# EAGLE board monome40h_grid (EAGLE 4.15)
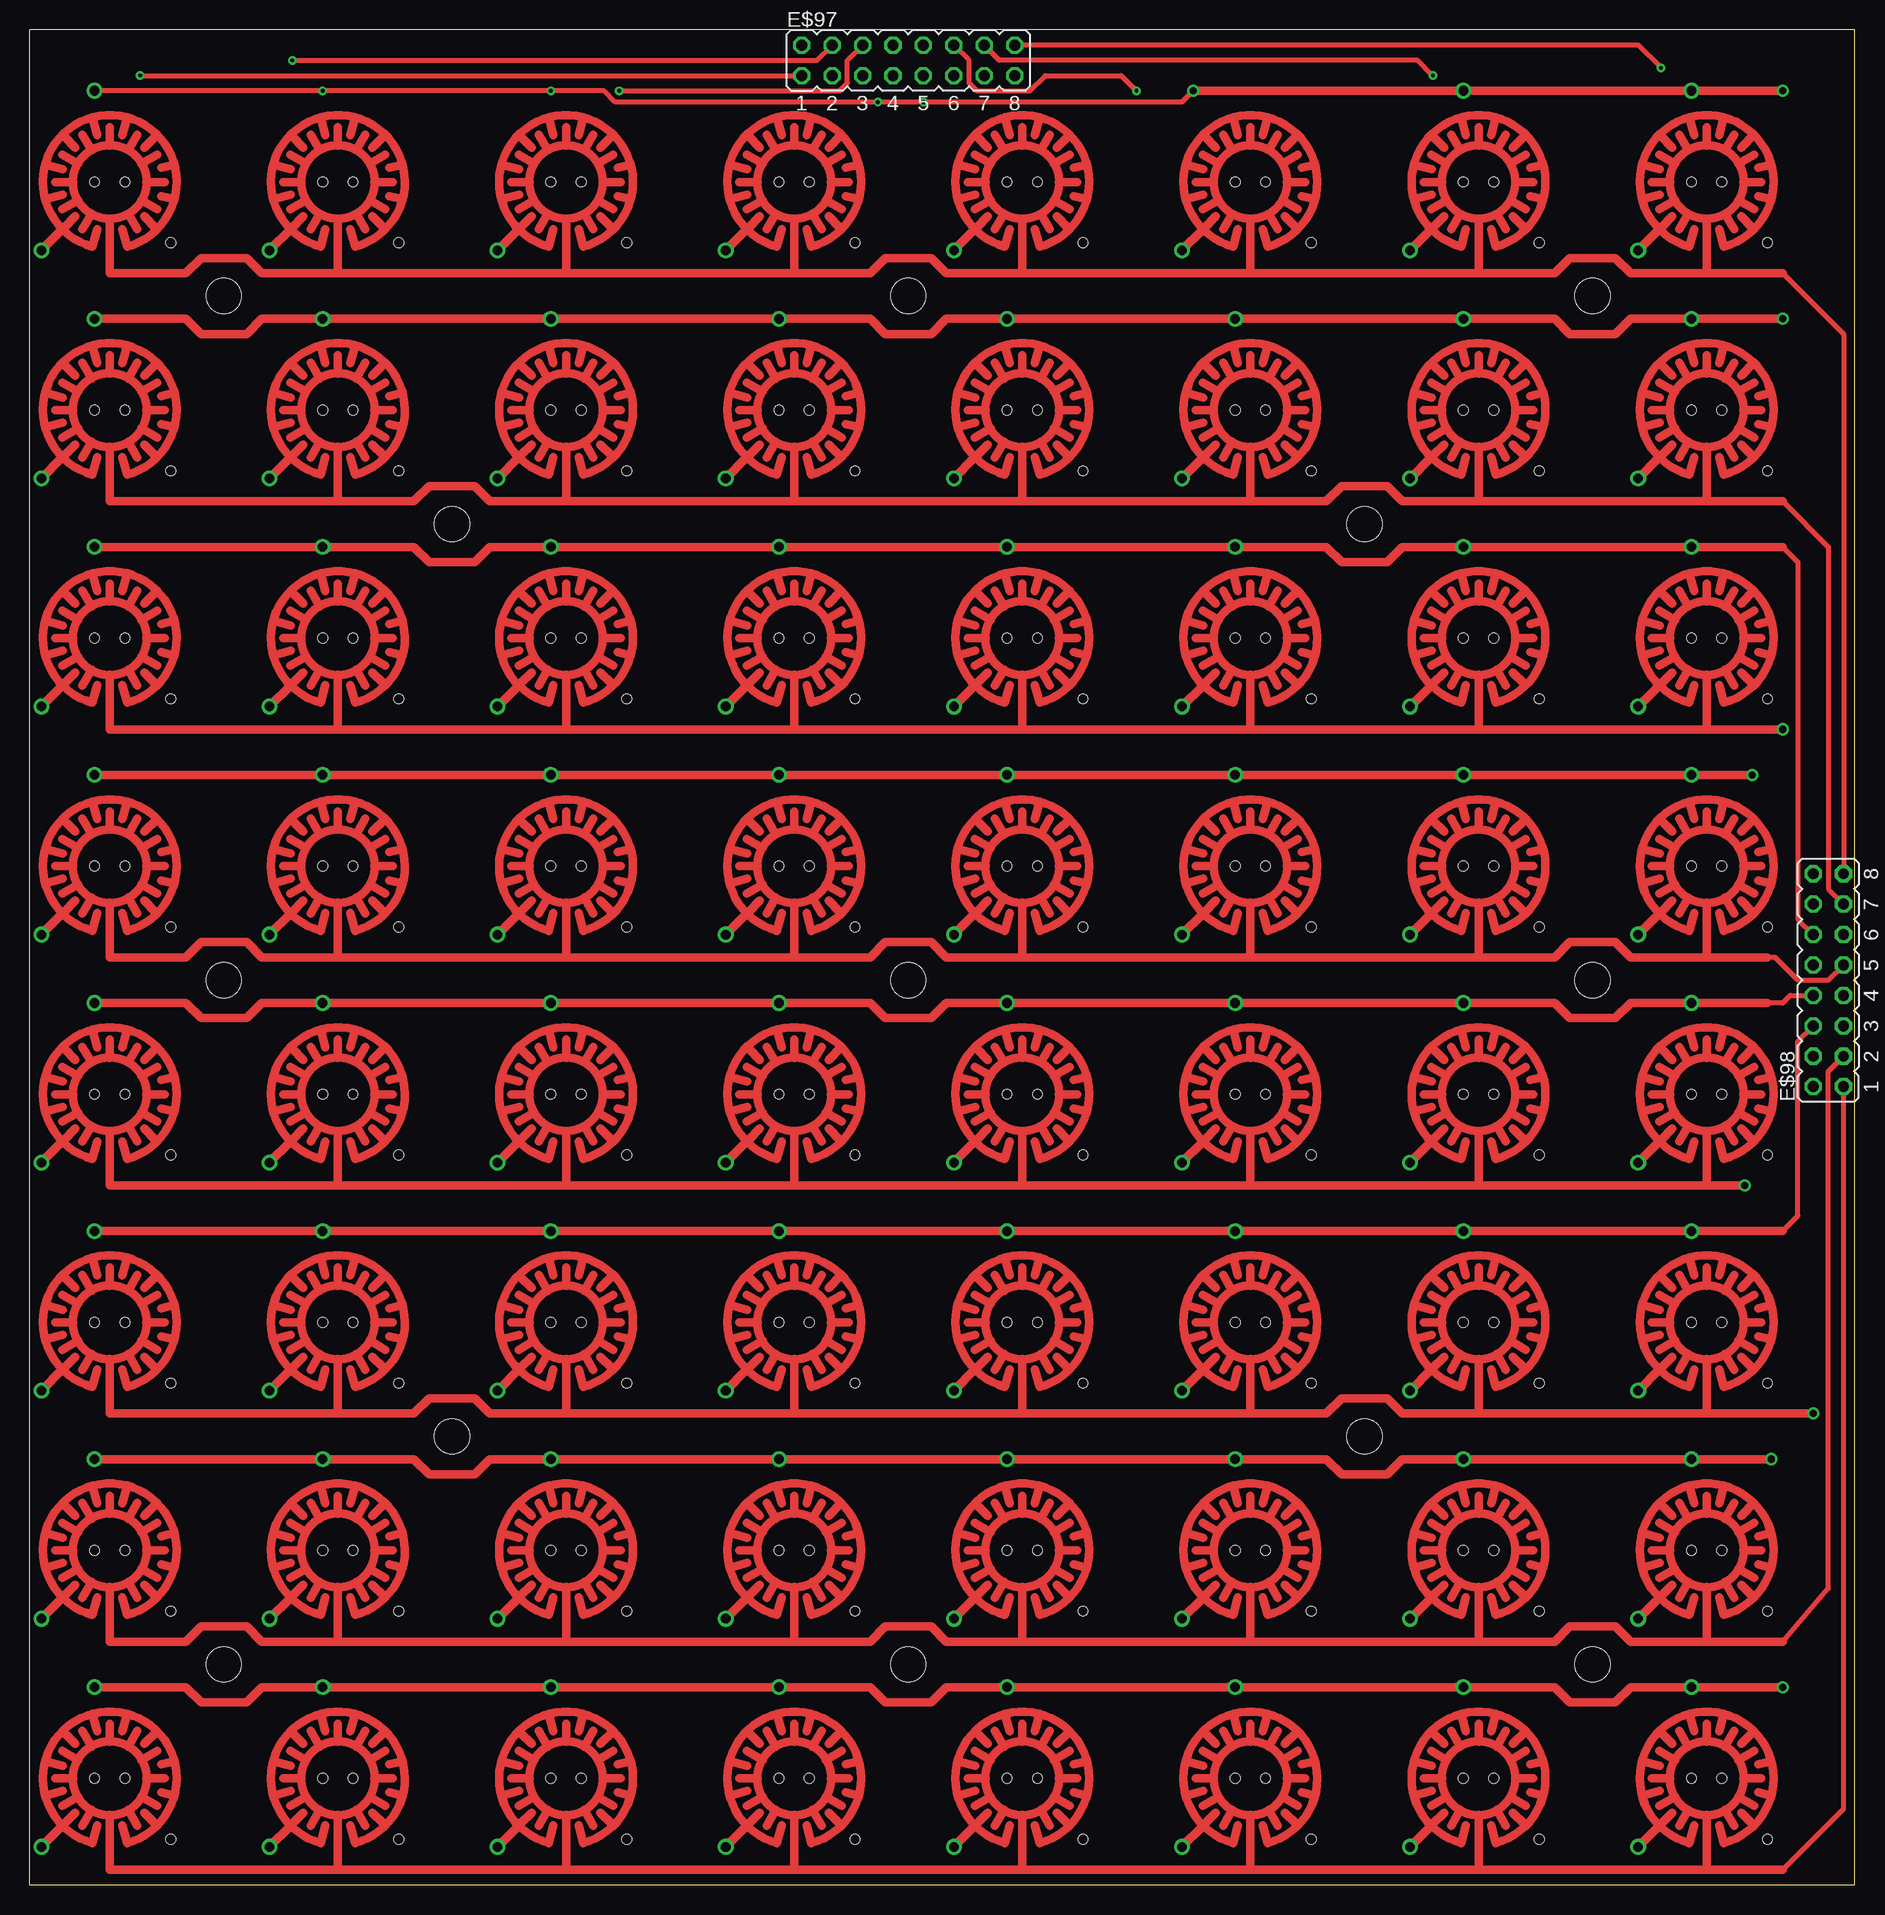
[diagram p0: board, top side]
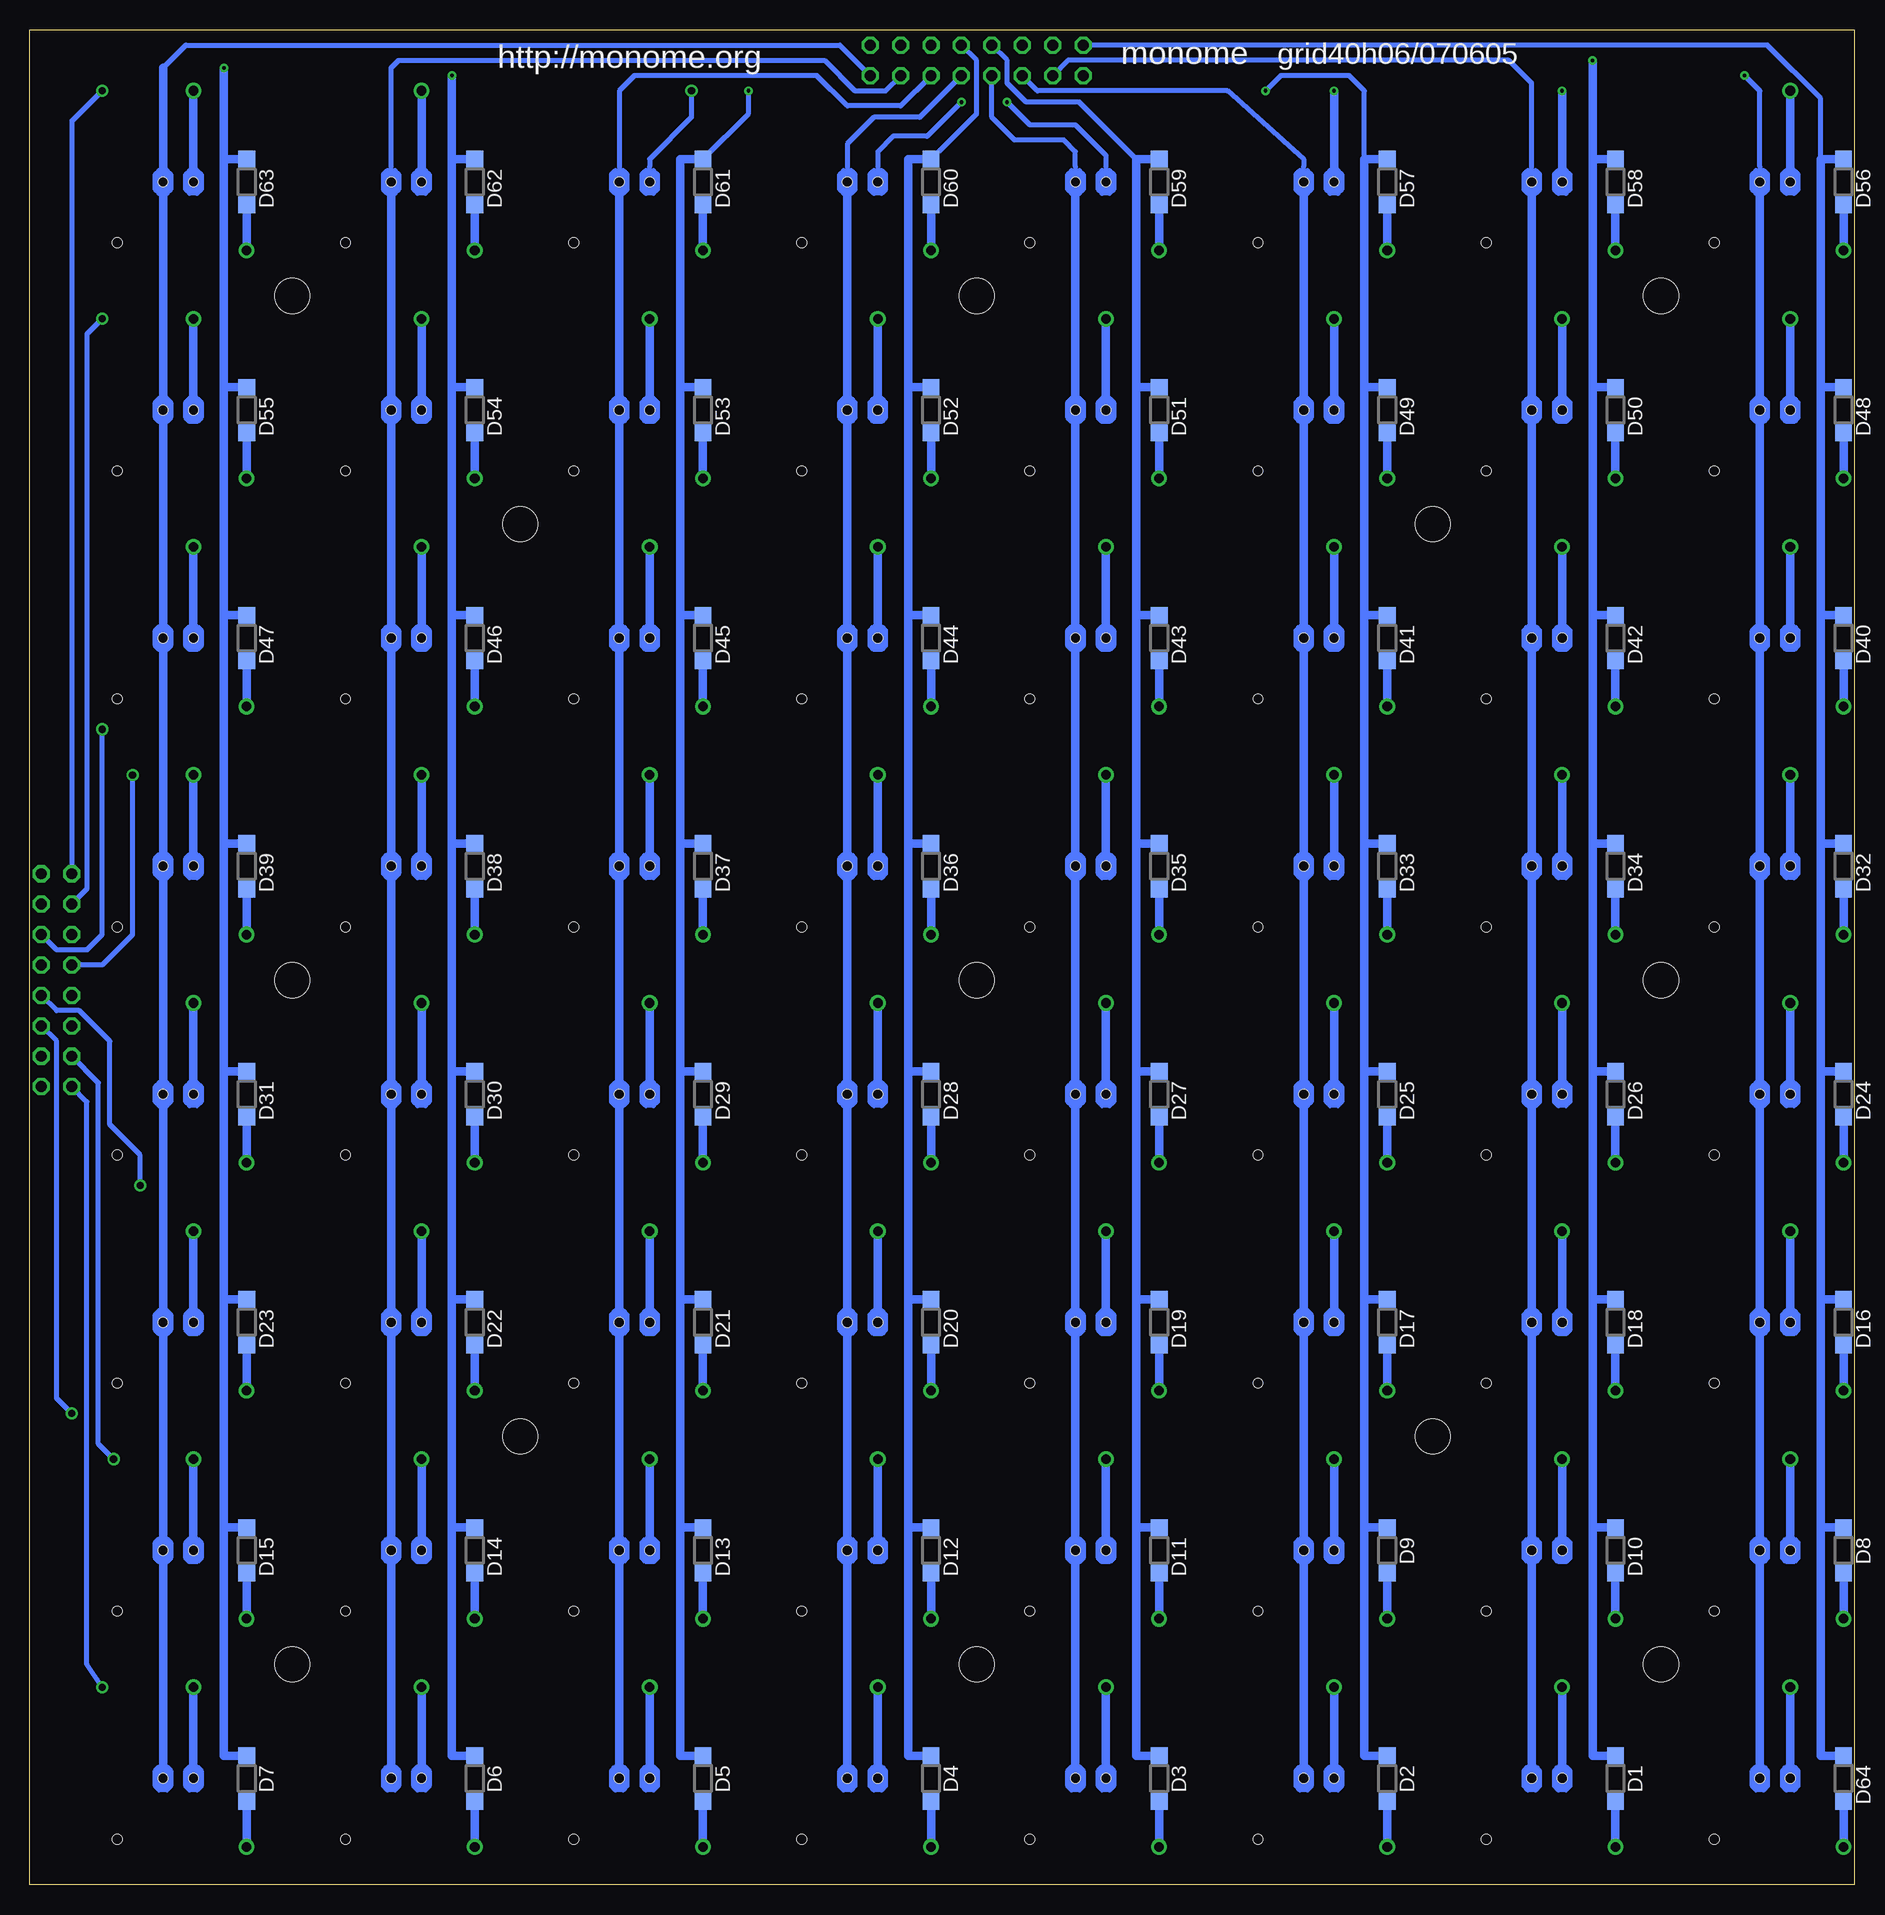
[diagram p1: board, bottom side, seen from below]

Size 152.4 x 154.94 mm. Coordinates in mm from the lower left corner, seen from the top.
Outline: 152.4,0 152.4,154.94 0,154.94 0,0 152.4,0
Copper layers (1*16): Top 0.035mm / dielectric 1.5mm / Bottom 0.035mm
Design rules "default": minimum track width 10mil, minimum drill 24mil, track to track 8mil, track to pad 8mil, pad to pad 8mil, via to via 8mil, smd to smd 8mil, copper to edge 40mil, drill to drill 8mil, minimum pad ring 10mil, minimum via ring 8mil, stop-mask expansion 4mil, vias tented up to drill 0mil, thermal gap 10mil
Holes 2.92 mm at 16.19,18.41 73.34,18.41 130.49,18.41 73.34,75.56 16.19,75.56 16.19,132.72 130.49,75.56 35.24,113.67 111.44,113.67 111.44,37.47 35.24,37.47 73.34,132.72 130.49,132.72

## Footprints (pad centres in the part's own frame; a part is rotated, then mirrored left to right if it is on the bottom)
SOD123 = smd 1.4 x 1.4: A 1.9,0; C -1.9,0
MPAD = drill 0.8 round: P$3 -1.27,7.62; P$4 -5.715,-5.715 | hole 0.8: 5.08,-5.08; -1.27,0; 1.27,0
MPAD2 = drill 0.8 round: P$4 -5.715,-5.715 | hole 0.8: 5.08,-5.08; -1.27,0; 1.27,0
JP8Q = drill 0.914 octagon: 1 -8.89,-1.27; 2 -8.89,1.27; 3 -6.35,-1.27; 4 -6.35,1.27; 5 -3.81,-1.27; 6 -3.81,1.27; 7 -1.27,-1.27; 8 -1.27,1.27; 9 1.27,-1.27; 10 1.27,1.27; 11 3.81,-1.27; 12 3.81,1.27; 13 6.35,-1.27; 14 6.35,1.27; 15 8.89,-1.27; 16 8.89,1.27

## Placement (x,y rotation side)
D1  [SOD123]  20,8.89 270 bottom
D2  [SOD123]  39.05,8.89 270 bottom
D3  [SOD123]  58.1,8.89 270 bottom
D4  [SOD123]  77.15,8.89 270 bottom
D5  [SOD123]  96.2,8.89 270 bottom
D6  [SOD123]  115.25,8.89 270 bottom
D7  [SOD123]  134.3,8.89 270 bottom
D8  [SOD123]  0.95,27.94 270 bottom
D9  [SOD123]  39.05,27.94 270 bottom
D10  [SOD123]  20,27.94 270 bottom
D11  [SOD123]  58.1,27.94 270 bottom
D12  [SOD123]  77.15,27.94 270 bottom
D13  [SOD123]  96.2,27.94 270 bottom
D14  [SOD123]  115.25,27.94 270 bottom
D15  [SOD123]  134.3,27.94 270 bottom
D16  [SOD123]  0.95,46.99 270 bottom
D17  [SOD123]  39.05,46.99 270 bottom
D18  [SOD123]  20,46.99 270 bottom
D19  [SOD123]  58.1,46.99 270 bottom
D20  [SOD123]  77.15,46.99 270 bottom
D21  [SOD123]  96.2,46.99 270 bottom
D22  [SOD123]  115.25,46.99 270 bottom
D23  [SOD123]  134.3,46.99 270 bottom
D24  [SOD123]  0.95,66.04 270 bottom
D25  [SOD123]  39.05,66.04 270 bottom
D26  [SOD123]  20,66.04 270 bottom
D27  [SOD123]  58.1,66.04 270 bottom
D28  [SOD123]  77.15,66.04 270 bottom
D29  [SOD123]  96.2,66.04 270 bottom
D30  [SOD123]  115.25,66.04 270 bottom
D31  [SOD123]  134.3,66.04 270 bottom
D32  [SOD123]  0.95,85.09 270 bottom
D33  [SOD123]  39.05,85.09 270 bottom
D34  [SOD123]  20,85.09 270 bottom
D35  [SOD123]  58.1,85.09 270 bottom
D36  [SOD123]  77.15,85.09 270 bottom
D37  [SOD123]  96.2,85.09 270 bottom
D38  [SOD123]  115.25,85.09 270 bottom
D39  [SOD123]  134.3,85.09 270 bottom
D40  [SOD123]  0.95,104.14 270 bottom
D41  [SOD123]  39.05,104.14 270 bottom
D42  [SOD123]  20,104.14 270 bottom
D43  [SOD123]  58.1,104.14 270 bottom
D44  [SOD123]  77.15,104.14 270 bottom
D45  [SOD123]  96.2,104.14 270 bottom
D46  [SOD123]  115.25,104.14 270 bottom
D47  [SOD123]  134.3,104.14 270 bottom
D48  [SOD123]  0.95,123.19 270 bottom
D49  [SOD123]  39.05,123.19 270 bottom
D50  [SOD123]  20,123.19 270 bottom
D51  [SOD123]  58.1,123.19 270 bottom
D52  [SOD123]  77.15,123.19 270 bottom
D53  [SOD123]  96.2,123.19 270 bottom
D54  [SOD123]  115.25,123.19 270 bottom
D55  [SOD123]  134.3,123.19 270 bottom
D56  [SOD123]  0.95,142.24 270 bottom
D57  [SOD123]  39.05,142.24 270 bottom
D58  [SOD123]  20,142.24 270 bottom
D59  [SOD123]  58.1,142.24 270 bottom
D60  [SOD123]  77.15,142.24 270 bottom
D61  [SOD123]  96.2,142.24 270 bottom
D62  [SOD123]  115.25,142.24 270 bottom
D63  [SOD123]  134.3,142.24 270 bottom
D64  [SOD123]  0.95,8.89 270 bottom
E$1  [MPAD]  6.67,8.89 0 top
E$2  [MPAD]  25.72,8.89 0 top
E$3  [MPAD]  44.77,8.89 0 top
E$4  [MPAD]  63.82,8.89 0 top
E$5  [MPAD]  82.87,8.89 0 top
E$6  [MPAD]  101.92,8.89 0 top
E$7  [MPAD]  120.97,8.89 0 top
E$8  [MPAD]  140.02,8.89 0 top
E$9  [MPAD]  6.67,27.94 0 top
E$10  [MPAD]  44.77,27.94 0 top
E$11  [MPAD]  25.72,27.94 0 top
E$12  [MPAD]  63.82,27.94 0 top
E$13  [MPAD]  82.87,27.94 0 top
E$14  [MPAD]  101.92,27.94 0 top
E$15  [MPAD]  120.97,27.94 0 top
E$16  [MPAD]  140.02,27.94 0 top
E$17  [MPAD]  6.67,46.99 0 top
E$18  [MPAD]  44.77,46.99 0 top
E$19  [MPAD]  25.72,46.99 0 top
E$20  [MPAD]  63.82,46.99 0 top
E$21  [MPAD]  82.87,46.99 0 top
E$22  [MPAD]  101.92,46.99 0 top
E$23  [MPAD]  120.97,46.99 0 top
E$24  [MPAD]  140.02,46.99 0 top
E$25  [MPAD]  6.67,66.04 0 top
E$26  [MPAD]  44.77,66.04 0 top
E$27  [MPAD]  25.72,66.04 0 top
E$28  [MPAD]  63.82,66.04 0 top
E$29  [MPAD]  82.87,66.04 0 top
E$30  [MPAD]  101.92,66.04 0 top
E$31  [MPAD]  120.97,66.04 0 top
E$32  [MPAD]  140.02,66.04 0 top
E$33  [MPAD]  6.67,85.09 0 top
E$34  [MPAD]  44.77,85.09 0 top
E$35  [MPAD]  25.72,85.09 0 top
E$36  [MPAD]  63.82,85.09 0 top
E$37  [MPAD]  82.87,85.09 0 top
E$38  [MPAD]  101.92,85.09 0 top
E$39  [MPAD]  120.97,85.09 0 top
E$40  [MPAD]  140.02,85.09 0 top
E$41  [MPAD]  6.67,104.14 0 top
E$42  [MPAD]  44.77,104.14 0 top
E$43  [MPAD]  25.72,104.14 0 top
E$44  [MPAD]  63.82,104.14 0 top
E$45  [MPAD]  82.87,104.14 0 top
E$46  [MPAD]  101.92,104.14 0 top
E$47  [MPAD]  120.97,104.14 0 top
E$48  [MPAD]  140.02,104.14 0 top
E$49  [MPAD]  6.67,123.19 0 top
E$50  [MPAD]  44.77,123.19 0 top
E$51  [MPAD]  25.72,123.19 0 top
E$52  [MPAD]  63.82,123.19 0 top
E$53  [MPAD]  82.87,123.19 0 top
E$54  [MPAD]  101.92,123.19 0 top
E$55  [MPAD]  120.97,123.19 0 top
E$56  [MPAD]  140.02,123.19 0 top
E$57  [MPAD]  6.67,142.24 0 top
E$58  [MPAD2]  25.72,142.24 0 top
E$59  [MPAD2]  44.77,142.24 0 top
E$60  [MPAD2]  82.87,142.24 0 top
E$61  [MPAD2]  63.82,142.24 0 top
E$62  [MPAD2]  101.92,142.24 0 top
E$63  [MPAD]  120.97,142.24 0 top
E$64  [MPAD]  140.02,142.24 0 top
E$97  [JP8Q]  73.34,152.4 0 top
E$98  [JP8Q]  150.18,75.56 90 top

## Library data of the parts
D1-D64 = diode
E$1-E$64 = monome
E$97 E$98 = jumper

## Nets
S$3: E$1.P$4
S$6: E$98.2
S$10: E$4.P$4
S$13: E$97.16
S$17: E$5.P$4
S$20: E$97.8
S$24: E$6.P$4
S$33: E$3.P$4
S$35: E$97.14
S$40: E$2.P$4
S$43: E$97.6
S$45: E$7.P$4
S$48: E$97.13
S$53: E$8.P$4
S$54: E$97.12
S$56: E$97.9
S$57: E$98.1
S$59: E$9.P$4
S$60: E$97.10
S$66: E$17.P$4
S$73: E$25.P$4
S$80: E$33.P$4
S$88: E$41.P$4
S$95: E$49.P$4
S$100: E$97.2
S$102: E$57.P$4
S$104: E$97.1
S$109: E$10.P$4
S$117: E$11.P$4
S$130: E$12.P$4
S$137: E$13.P$4
S$144: E$14.P$4
S$151: E$15.P$4
S$158: E$16.P$4
S$159: E$98.4
S$162: E$98.3
S$164: E$18.P$4
S$171: E$19.P$4
S$180: E$20.P$4
S$187: E$21.P$4
S$194: E$22.P$4
S$201: E$23.P$4
S$208: E$24.P$4
S$209: E$98.6
S$212: E$98.5
S$215: E$26.P$4
S$222: E$27.P$4
S$231: E$28.P$4
S$238: E$29.P$4
S$245: E$30.P$4
S$252: E$31.P$4
S$259: E$32.P$4
S$260: E$98.8
S$263: E$98.7
S$266: E$34.P$4
S$273: E$35.P$4
S$282: E$36.P$4
S$289: E$37.P$4
S$296: E$38.P$4
S$303: E$39.P$4
S$310: E$40.P$4
S$311: E$98.10
S$314: E$98.9
S$317: E$42.P$4
S$324: E$43.P$4
S$333: E$44.P$4
S$340: E$45.P$4
S$347: E$46.P$4
S$354: E$47.P$4
S$361: E$48.P$4
S$362: E$98.12
S$365: E$98.11
S$368: E$50.P$4
S$375: E$51.P$4
S$384: E$52.P$4
S$391: E$53.P$4
S$398: E$54.P$4
S$405: E$55.P$4
S$412: E$56.P$4
S$413: E$98.14
S$416: E$98.13
S$421: E$97.5
S$424: E$97.4
S$428: E$97.3
S$437: E$97.7
S$451: E$97.11
S$456: E$63.P$4
S$463: E$64.P$4
S$464: E$98.16
S$471: E$97.15
S$473: E$98.15

## Tracks (layer width: path | path; a pad name or v marks a point on that pad's centre or on a via)
S$1
  Bottom 0.711: 2.86,20.32 2.86,10.79 0.95,10.79
S$2
  Bottom 0.711: 5.4,10.16 5.4,16.51
S$3
  Bottom 0.711: E$1.P$4 0.95,6.99
S$4
  Top 0.711: 5.4,16.51 13.02,16.51 14.29,15.24 18.1,15.24 19.37,16.51
S$5
  Bottom 0.711: 7.94,10.16 7.94,20.32
S$6  (via drill 0.6)
  Top 0.711: 133.67,16.51 v146.37,16.51
  Bottom 0.406: v146.37,16.51 147.64,18.41 147.64,65.41 E$98.2
S$7
  Top 0.711: 6.67,1.27 19.37,1.27
S$8
  Bottom 0.711: 60.01,20.32 60.01,10.79 58.1,10.79
S$9
  Bottom 0.711: 62.55,10.16 62.55,16.51
S$10
  Bottom 0.711: E$4.P$4 58.1,6.99
S$11
  Top 0.711: 57.47,16.51 70.17,16.51 71.44,15.24 75.25,15.24 76.52,16.51
S$12
  Bottom 0.711: 65.09,10.16 65.09,20.32
S$13  (via drill 0.3)
  Top 0.406: E$97.16 134.3,153.67 v136.21,151.76
  Bottom 0.711: 136.21,144.15 v136.21,151.76 | 136.21,144.15 134.3,144.15 | 136.21,134.62 136.21,144.15
S$14
  Top 0.711: 57.47,1.27 76.52,1.27
S$15
  Bottom 0.711: 79.06,20.32 79.06,10.79 77.15,10.79
S$16
  Bottom 0.711: 81.6,10.16 81.6,16.51
S$17
  Bottom 0.711: E$5.P$4 77.15,6.99
S$18
  Top 0.711: 76.52,16.51 95.57,16.51
S$19
  Bottom 0.711: 84.14,10.16 84.14,20.32
S$20
  Bottom 0.406: 60.01,144.15 64.77,148.91 69.22,148.91 70.8,150.5 70.8,152.4 E$97.8
S$21
  Top 0.711: 76.52,1.27 95.57,1.27
S$22
  Bottom 0.711: 98.11,20.32 98.11,10.79 96.2,10.79
S$23
  Bottom 0.711: 100.65,10.16 100.65,16.51
S$24
  Bottom 0.711: E$6.P$4 96.2,6.99
S$25
  Top 0.711: 95.57,16.51 114.62,16.51
S$26
  Top 0.711: 38.42,16.51 57.47,16.51
S$27
  Bottom 0.711: 103.19,10.16 103.19,20.32
S$28
  Bottom 0.711: 40.96,20.32 40.96,10.79 39.05,10.79
S$29  (via drill 0.3, 0.6)
  Top 0.406: 5.4,149.86 v24.45,149.86 v43.5,149.86 47.94,149.86 48.9,148.91 v70.8,148.91 v74.61,148.91 96.2,148.91 v97.16,149.86
  Top 0.711: 114.62,149.86 v97.16,149.86
  Bottom 0.406: 100.65,143.51 100.65,144.15 97.16,147.64 v97.16,149.86 | 81.6,143.51 81.6,144.78 80.33,146.05 77.47,146.05 v74.61,148.91 | v70.8,148.91 68.9,147 65.09,147 62.55,144.46 62.55,143.51
  Bottom 0.711: v24.45,149.86 24.45,143.51 | 43.5,143.51 v43.5,149.86
S$30
  Top 0.711: 95.57,1.27 114.62,1.27
S$31
  Bottom 0.711: 117.16,20.32 117.16,10.79 115.25,10.79
S$32
  Bottom 0.711: 43.5,10.16 43.5,16.51
S$33
  Bottom 0.711: E$3.P$4 39.05,6.99
S$34
  Bottom 0.711: 46.04,10.16 46.04,20.32
S$35  (via drill 0.3)
  Top 0.406: E$97.14 80.96,152.4 115.89,152.4 v117.16,151.13
  Bottom 0.711: 117.16,144.15 v117.16,151.13 | 115.25,144.15 117.16,144.15 | 117.16,144.15 117.16,134.62
S$36
  Top 0.711: 38.42,1.27 57.47,1.27
S$37
  Bottom 0.711: 119.7,10.16 119.7,16.51
S$38
  Bottom 0.711: 21.91,20.32 21.91,10.79 20,10.79
S$39
  Bottom 0.711: 24.45,10.16 24.45,16.51
S$40
  Bottom 0.711: E$2.P$4 20,6.99
S$41
  Top 0.711: 19.37,16.51 38.42,16.51
S$42
  Bottom 0.711: 26.99,10.16 26.99,20.32
S$43  (via drill 0.3)
  Top 0.406: v49.21,149.86 67.63,149.86 68.26,150.5 68.26,152.4 E$97.6
  Bottom 0.406: 40.96,144.15 40.96,149.86 42.23,151.13 47.94,151.13 v49.21,149.86
  Bottom 0.711: 39.05,144.15 40.96,144.15 40.96,134.62
S$44
  Top 0.711: 19.37,1.27 38.42,1.27
S$45
  Bottom 0.711: E$7.P$4 115.25,6.99
S$46
  Top 0.711: 114.62,16.51 127.32,16.51 128.59,15.24 132.4,15.24 133.67,16.51
S$47
  Bottom 0.711: 122.24,10.16 122.24,20.32
S$48
  Bottom 0.406: E$97.13 80.96,149.86 83.5,149.86 86.04,152.4 121.6,152.4 122.24,151.76 122.24,143.51
S$49
  Top 0.711: 114.62,1.27 127.32,1.27
S$50
  Bottom 0.711: 136.21,20.32 136.21,10.79 134.3,10.79
S$51
  Bottom 0.711: 138.75,10.16 138.75,16.51
S$52
  Bottom 0.711: 2.86,29.84 2.86,39.37 | 2.86,29.84 0.95,29.84 | 2.86,20.32 2.86,29.84
S$53
  Bottom 0.711: E$8.P$4 134.3,6.99
S$54  (via drill 0.3)
  Top 0.406: E$97.12 78.42,152.4 78.42,150.5 79.06,149.86 83.5,149.86 84.77,151.13 91.12,151.13 v92.39,149.86
S$55
  Bottom 0.711: 141.29,10.16 141.29,20.32
S$56
  Bottom 0.406: E$97.9 78.11,147.64 81.92,147.64 84.14,145.41 84.14,143.51
S$57
  Top 0.406: E$98.1 151.45,6.35 146.37,1.27
  Top 0.711: 127.32,1.27 146.37,1.27
S$58
  Bottom 0.711: 5.4,29.21 5.4,35.56
S$59
  Bottom 0.711: E$9.P$4 0.95,26.04
S$60
  Bottom 0.406: 76.52,144.78 73.34,147.96 73.34,152.4 E$97.10
S$61
  Bottom 0.711: 7.94,29.21 7.94,39.37
S$62
  Bottom 0.711: 7.94,20.32 7.94,26.67
S$63
  Top 0.711: 6.67,20.32 13.02,20.32
S$64
  Bottom 0.711: 2.86,48.9 2.86,58.42 | 2.86,48.9 0.95,48.9 | 2.86,39.37 2.86,48.9
S$65
  Bottom 0.711: 5.4,48.26 5.4,54.61
S$66
  Bottom 0.711: E$17.P$4 0.95,45.09
S$68
  Bottom 0.711: 7.94,48.26 7.94,58.42
S$69
  Bottom 0.711: 7.94,39.37 7.94,45.72
S$71
  Bottom 0.711: 2.86,67.94 2.86,77.47 | 2.86,67.94 0.95,67.94 | 2.86,58.42 2.86,67.94
S$72
  Bottom 0.711: 5.4,67.31 5.4,73.66
S$73
  Bottom 0.711: E$25.P$4 0.95,64.14
S$75
  Bottom 0.711: 7.94,67.31 7.94,77.47
S$76
  Bottom 0.711: 7.94,58.42 7.94,64.77
S$78
  Bottom 0.711: 2.86,87 2.86,96.52 | 2.86,87 0.95,87 | 2.86,77.47 2.86,87
S$79
  Bottom 0.711: 5.4,86.36 5.4,92.71
S$80
  Bottom 0.711: E$33.P$4 0.95,83.19
S$82
  Bottom 0.711: 7.94,86.36 7.94,96.52
S$84
  Bottom 0.711: 7.94,77.47 7.94,83.82
S$86
  Bottom 0.711: 2.86,106.05 2.86,115.57 | 2.86,106.05 0.95,106.05 | 2.86,96.52 2.86,106.05
S$87
  Bottom 0.711: 5.4,105.41 5.4,111.76
S$88
  Bottom 0.711: E$41.P$4 0.95,102.23
S$90
  Bottom 0.711: 7.94,105.41 7.94,115.57
S$91
  Bottom 0.711: 7.94,96.52 7.94,102.87
S$93
  Bottom 0.711: 2.86,125.09 2.86,134.62 | 2.86,125.09 0.95,125.09 | 2.86,115.57 2.86,125.09
S$94
  Bottom 0.711: 5.4,124.46 5.4,130.81
S$95
  Bottom 0.711: E$49.P$4 0.95,121.28
S$97
  Bottom 0.711: 7.94,124.46 7.94,134.62
S$98
  Bottom 0.711: 7.94,115.57 7.94,121.92
S$100
  Bottom 0.406: 2.86,144.15 2.86,149.22 7.3,153.67 E$97.2
  Bottom 0.711: 0.95,144.15 2.86,144.15 2.86,134.62
S$101
  Bottom 0.711: 5.4,143.51 5.4,149.86
S$102
  Bottom 0.711: E$57.P$4 0.95,140.34
S$104  (via drill 0.3)
  Top 0.406: v9.21,151.13 E$97.1
  Bottom 0.406: v9.21,151.13 7.94,149.86 7.94,143.51
S$105
  Bottom 0.711: 7.94,134.62 7.94,140.97
S$107
  Bottom 0.711: 40.96,29.84 40.96,39.37 | 40.96,29.84 39.05,29.84 | 40.96,20.32 40.96,29.84
S$108
  Bottom 0.711: 43.5,29.21 43.5,35.56
S$109
  Bottom 0.711: E$10.P$4 39.05,26.04
S$110
  Top 0.711: 38.42,35.56 57.47,35.56
S$111
  Bottom 0.711: 46.04,29.21 46.04,39.37
S$112
  Bottom 0.711: 40.96,48.9 40.96,58.42 | 40.96,48.9 39.05,48.9 | 40.96,39.37 40.96,48.9
S$113
  Bottom 0.711: 46.04,20.32 46.04,26.67
S$114
  Top 0.711: 38.42,20.32 57.47,20.32
S$115
  Bottom 0.711: 21.91,29.84 21.91,39.37 | 21.91,29.84 20,29.84 | 21.91,20.32 21.91,29.84
S$116
  Bottom 0.711: 24.45,29.21 24.45,35.56
S$117
  Bottom 0.711: E$11.P$4 20,26.04
S$118
  Top 0.711: 19.37,35.56 32.07,35.56 33.34,34.29 37.15,34.29 38.42,35.56
S$119
  Bottom 0.711: 26.99,29.21 26.99,39.37
S$120
  Bottom 0.711: 26.99,20.32 26.99,26.67
S$121
  Top 0.711: 19.37,20.32 38.42,20.32
S$126
  Top 0.711: 5.4,35.56 19.37,35.56
S$127
  Top 0.711: 6.67,20.32 13.02,20.32 14.29,21.59 18.1,21.59 19.37,20.32
S$128
  Bottom 0.711: 60.01,29.84 60.01,39.37 | 60.01,29.84 58.1,29.84 | 60.01,20.32 60.01,29.84
S$129
  Bottom 0.711: 62.55,29.21 62.55,35.56
S$130
  Bottom 0.711: E$12.P$4 58.1,26.04
S$131
  Top 0.711: 57.47,35.56 76.52,35.56
S$132
  Bottom 0.711: 65.09,29.21 65.09,39.37
S$133
  Bottom 0.711: 65.09,20.32 65.09,26.67
S$134
  Top 0.711: 57.47,20.32 70.17,20.32 71.44,21.59 75.25,21.59 76.52,20.32
S$135
  Bottom 0.711: 79.06,29.84 79.06,39.37 | 79.06,29.84 77.15,29.84 | 79.06,20.32 79.06,29.84
S$136
  Bottom 0.711: 81.6,29.21 81.6,35.56
S$137
  Bottom 0.711: E$13.P$4 77.15,26.04
S$138
  Top 0.711: 76.52,35.56 95.57,35.56
S$139
  Bottom 0.711: 84.14,29.21 84.14,39.37
S$140
  Bottom 0.711: 84.14,20.32 84.14,26.67
S$141
  Top 0.711: 76.52,20.32 95.57,20.32
S$142
  Bottom 0.711: 98.11,29.84 98.11,39.37 | 98.11,29.84 96.2,29.84 | 98.11,20.32 98.11,29.84
S$143
  Bottom 0.711: 100.65,29.21 100.65,35.56
S$144
  Bottom 0.711: E$14.P$4 96.2,26.04
S$145
  Top 0.711: 95.57,35.56 108.27,35.56 109.54,34.29 113.35,34.29 114.62,35.56
S$146
  Bottom 0.711: 103.19,29.21 103.19,39.37
S$147
  Bottom 0.711: 103.19,20.32 103.19,26.67
S$148
  Top 0.711: 95.57,20.32 114.62,20.32
S$149
  Bottom 0.711: 117.16,29.84 117.16,39.37 | 117.16,29.84 115.25,29.84 | 117.16,20.32 117.16,29.84
S$150
  Bottom 0.711: 119.7,29.21 119.7,35.56
S$151
  Bottom 0.711: E$15.P$4 115.25,26.04
S$152
  Top 0.711: 114.62,35.56 133.67,35.56
S$153
  Bottom 0.711: 122.24,29.21 122.24,39.37
S$154
  Bottom 0.711: 122.24,20.32 122.24,26.67
S$155
  Top 0.711: 114.62,20.32 127.32,20.32
S$156
  Bottom 0.711: 136.21,29.84 136.21,39.37 | 136.21,29.84 134.3,29.84 | 136.21,20.32 136.21,29.84
S$157
  Bottom 0.711: 138.75,29.21 138.75,35.56
S$158
  Bottom 0.711: E$16.P$4 134.3,26.04
S$159  (via drill 0.6)
  Top 0.711: 133.67,35.56 v145.41,35.56
  Bottom 0.406: v145.41,35.56 146.69,36.83 146.69,66.99 E$98.4
S$160
  Bottom 0.711: 141.29,29.21 141.29,39.37
S$161
  Bottom 0.711: 141.29,20.32 141.29,26.67
S$162
  Top 0.406: 146.37,20.32 150.18,24.77 150.18,67.94 E$98.3
  Top 0.711: 127.32,20.32 128.59,21.59 132.4,21.59 133.67,20.32 146.37,20.32
S$163
  Bottom 0.711: 43.5,48.26 43.5,54.61
S$164
  Bottom 0.711: E$18.P$4 39.05,45.09
S$165
  Top 0.711: 38.42,54.61 57.47,54.61
S$166
  Bottom 0.711: 46.04,48.26 46.04,58.42
S$167
  Bottom 0.711: 46.04,39.37 46.04,45.72
S$168
  Top 0.711: 38.42,39.37 57.47,39.37
S$169
  Bottom 0.711: 21.91,48.9 21.91,58.42 | 21.91,48.9 20,48.9 | 21.91,39.37 21.91,48.9
S$170
  Bottom 0.711: 24.45,48.26 24.45,54.61
S$171
  Bottom 0.711: E$19.P$4 20,45.09
S$172
  Top 0.711: 19.37,54.61 38.42,54.61
S$173
  Bottom 0.711: 26.99,48.26 26.99,58.42
S$174
  Bottom 0.711: 26.99,39.37 26.99,45.72
S$175
  Top 0.711: 19.37,39.37 32.07,39.37 33.34,40.64 37.15,40.64 38.42,39.37
S$176
  Top 0.711: 5.4,54.61 19.37,54.61
S$177
  Top 0.711: 6.67,39.37 19.37,39.37
S$178
  Bottom 0.711: 60.01,48.9 60.01,58.42 | 60.01,48.9 58.1,48.9 | 60.01,39.37 60.01,48.9
S$179
  Bottom 0.711: 62.55,48.26 62.55,54.61
S$180
  Bottom 0.711: E$20.P$4 58.1,45.09
S$181
  Top 0.711: 57.47,54.61 76.52,54.61
S$182
  Bottom 0.711: 65.09,48.26 65.09,58.42
S$183
  Bottom 0.711: 65.09,39.37 65.09,45.72
S$184
  Top 0.711: 57.47,39.37 76.52,39.37
S$185
  Bottom 0.711: 79.06,48.9 79.06,58.42 | 79.06,48.9 77.15,48.9 | 79.06,39.37 79.06,48.9
S$186
  Bottom 0.711: 81.6,48.26 81.6,54.61
S$187
  Bottom 0.711: E$21.P$4 77.15,45.09
S$188
  Top 0.711: 76.52,54.61 95.57,54.61
S$189
  Bottom 0.711: 84.14,48.26 84.14,58.42
S$190
  Bottom 0.711: 84.14,39.37 84.14,45.72
S$191
  Top 0.711: 76.52,39.37 95.57,39.37
S$192
  Bottom 0.711: 98.11,48.9 98.11,58.42 | 98.11,48.9 96.2,48.9 | 98.11,39.37 98.11,48.9
S$193
  Bottom 0.711: 100.65,48.26 100.65,54.61
S$194
  Bottom 0.711: E$22.P$4 96.2,45.09
S$195
  Top 0.711: 95.57,54.61 114.62,54.61
S$196
  Bottom 0.711: 103.19,48.26 103.19,58.42
S$197
  Bottom 0.711: 103.19,39.37 103.19,45.72
S$198
  Top 0.711: 95.57,39.37 108.27,39.37 109.54,40.64 113.35,40.64 114.62,39.37
S$199
  Bottom 0.711: 117.16,48.9 117.16,58.42 | 117.16,48.9 115.25,48.9 | 117.16,39.37 117.16,48.9
S$200
  Bottom 0.711: 119.7,48.26 119.7,54.61
S$201
  Bottom 0.711: E$23.P$4 115.25,45.09
S$202
  Top 0.711: 114.62,54.61 133.67,54.61
S$203
  Bottom 0.711: 122.24,48.26 122.24,58.42
S$204
  Bottom 0.711: 122.24,39.37 122.24,45.72
S$205
  Top 0.711: 114.62,39.37 127.32,39.37
S$206
  Bottom 0.711: 136.21,48.9 136.21,58.42 | 136.21,48.9 134.3,48.9 | 136.21,39.37 136.21,48.9
S$207
  Bottom 0.711: 138.75,48.26 138.75,54.61
S$208
  Bottom 0.711: E$24.P$4 134.3,45.09
S$209
  Top 0.406: 146.37,54.61 147.64,55.88 147.64,70.48 E$98.6
  Top 0.711: 133.67,54.61 146.37,54.61
S$210
  Bottom 0.711: 141.29,48.26 141.29,58.42
S$211
  Bottom 0.711: 141.29,39.37 141.29,45.72
S$212  (via drill 0.6)
  Top 0.711: 127.32,39.37 v148.91,39.37
  Bottom 0.406: v148.91,39.37 150.18,40.64 150.18,70.48 E$98.5
S$213
  Bottom 0.711: 40.96,67.94 40.96,77.47 | 40.96,67.94 39.05,67.94 | 40.96,58.42 40.96,67.94
S$214
  Bottom 0.711: 43.5,67.31 43.5,73.66
S$215
  Bottom 0.711: E$26.P$4 39.05,64.14
S$216
  Top 0.711: 38.42,73.66 57.47,73.66
S$217
  Bottom 0.711: 46.04,67.31 46.04,77.47
S$218
  Bottom 0.711: 46.04,58.42 46.04,64.77
S$219
  Top 0.711: 38.42,58.42 57.47,58.42
S$220
  Bottom 0.711: 21.91,67.94 21.91,77.47 | 21.91,67.94 20,67.94 | 21.91,58.42 21.91,67.94
S$221
  Bottom 0.711: 24.45,67.31 24.45,73.66
S$222
  Bottom 0.711: E$27.P$4 20,64.14
S$223
  Top 0.711: 19.37,73.66 38.42,73.66
S$224
  Bottom 0.711: 26.99,67.31 26.99,77.47
S$225
  Bottom 0.711: 26.99,58.42 26.99,64.77
S$226
  Top 0.711: 19.37,58.42 38.42,58.42
S$227
  Top 0.711: 5.4,73.66 13.02,73.66 14.29,72.39 18.1,72.39 19.37,73.66
S$228
  Top 0.711: 6.67,58.42 19.37,58.42
S$229
  Bottom 0.711: 60.01,67.94 60.01,77.47 | 60.01,67.94 58.1,67.94 | 60.01,58.42 60.01,67.94
S$230
  Bottom 0.711: 62.55,67.31 62.55,73.66
S$231
  Bottom 0.711: E$28.P$4 58.1,64.14
S$232
  Top 0.711: 57.47,73.66 70.17,73.66 71.44,72.39 75.25,72.39 76.52,73.66
S$233
  Bottom 0.711: 65.09,67.31 65.09,77.47
S$234
  Bottom 0.711: 65.09,58.42 65.09,64.77
S$235
  Top 0.711: 57.47,58.42 76.52,58.42
S$236
  Bottom 0.711: 79.06,67.94 79.06,77.47 | 79.06,67.94 77.15,67.94 | 79.06,58.42 79.06,67.94
S$237
  Bottom 0.711: 81.6,67.31 81.6,73.66
S$238
  Bottom 0.711: E$29.P$4 77.15,64.14
S$239
  Top 0.711: 76.52,73.66 95.57,73.66
S$240
  Bottom 0.711: 84.14,67.31 84.14,77.47
S$241
  Bottom 0.711: 84.14,58.42 84.14,64.77
S$242
  Top 0.711: 76.52,58.42 95.57,58.42
S$243
  Bottom 0.711: 98.11,67.94 98.11,77.47 | 98.11,67.94 96.2,67.94 | 98.11,58.42 98.11,67.94
S$244
  Bottom 0.711: 100.65,67.31 100.65,73.66
S$245
  Bottom 0.711: E$30.P$4 96.2,64.14
S$246
  Top 0.711: 95.57,73.66 114.62,73.66
S$247
  Bottom 0.711: 103.19,67.31 103.19,77.47
S$248
  Bottom 0.711: 103.19,58.42 103.19,64.77
S$249
  Top 0.711: 95.57,58.42 114.62,58.42
S$250
  Bottom 0.711: 117.16,67.94 117.16,77.47 | 117.16,67.94 115.25,67.94 | 117.16,58.42 117.16,67.94
S$251
  Bottom 0.711: 119.7,67.31 119.7,73.66
S$252
  Bottom 0.711: E$31.P$4 115.25,64.14
S$253
  Top 0.711: 114.62,73.66 127.32,73.66 128.59,72.39 132.4,72.39 133.67,73.66
S$254
  Bottom 0.711: 122.24,67.31 122.24,77.47
S$255
  Bottom 0.711: 122.24,58.42 122.24,64.77
S$256
  Top 0.711: 114.62,58.42 127.32,58.42
S$257
  Bottom 0.711: 136.21,67.94 136.21,77.47 | 136.21,67.94 134.3,67.94 | 136.21,58.42 136.21,67.94
S$258
  Bottom 0.711: 138.75,67.31 138.75,73.66
S$259
  Bottom 0.711: E$32.P$4 134.3,64.14
S$260
  Top 0.406: 145.1,73.66 146.37,73.66 147,74.3 E$98.8
  Top 0.711: 133.67,73.66 145.1,73.66
S$261
  Bottom 0.711: 141.29,67.31 141.29,77.47
S$262
  Bottom 0.711: 141.29,58.42 141.29,64.77
S$263  (via drill 0.6)
  Top 0.711: 127.32,58.42 v143.19,58.42
  Bottom 0.406: v143.19,58.42 143.19,60.96 145.73,63.5 145.73,70.48 148.27,73.03 150.18,73.03 E$98.7
S$264
  Bottom 0.711: 40.96,87 40.96,96.52 | 40.96,87 39.05,87 | 40.96,77.47 40.96,87
S$265
  Bottom 0.711: 43.5,86.36 43.5,92.71
S$266
  Bottom 0.711: E$34.P$4 39.05,83.19
S$267
  Top 0.711: 38.42,92.71 57.47,92.71
S$268
  Bottom 0.711: 46.04,86.36 46.04,96.52
S$269
  Bottom 0.711: 46.04,77.47 46.04,83.82
S$270
  Top 0.711: 38.42,77.47 57.47,77.47
S$271
  Bottom 0.711: 21.91,87 21.91,96.52 | 21.91,87 20,87 | 21.91,77.47 21.91,87
S$272
  Bottom 0.711: 24.45,86.36 24.45,92.71
S$273
  Bottom 0.711: E$35.P$4 20,83.19
S$274
  Top 0.711: 19.37,92.71 38.42,92.71
S$275
  Bottom 0.711: 26.99,86.36 26.99,96.52
S$276
  Bottom 0.711: 26.99,77.47 26.99,83.82
S$277
  Top 0.711: 19.37,77.47 38.42,77.47
S$278
  Top 0.711: 5.4,92.71 19.37,92.71
S$279
  Top 0.711: 6.67,77.47 13.02,77.47 14.29,78.74 18.1,78.74 19.37,77.47
S$280
  Bottom 0.711: 60.01,87 60.01,96.52 | 60.01,87 58.1,87 | 60.01,77.47 60.01,87
S$281
  Bottom 0.711: 62.55,86.36 62.55,92.71
S$282
  Bottom 0.711: E$36.P$4 58.1,83.19
S$283
  Top 0.711: 57.47,92.71 76.52,92.71
S$284
  Bottom 0.711: 65.09,86.36 65.09,96.52
S$285
  Bottom 0.711: 65.09,77.47 65.09,83.82
S$286
  Top 0.711: 57.47,77.47 70.17,77.47 71.44,78.74 75.25,78.74 76.52,77.47
S$287
  Bottom 0.711: 79.06,87 79.06,96.52 | 79.06,87 77.15,87 | 79.06,77.47 79.06,87
S$288
  Bottom 0.711: 81.6,86.36 81.6,92.71
S$289
  Bottom 0.711: E$37.P$4 77.15,83.19
S$290
  Top 0.711: 76.52,92.71 95.57,92.71
S$291
  Bottom 0.711: 84.14,86.36 84.14,96.52
S$292
  Bottom 0.711: 84.14,77.47 84.14,83.82
S$293
  Top 0.711: 76.52,77.47 95.57,77.47
S$294
  Bottom 0.711: 98.11,87 98.11,96.52 | 98.11,87 96.2,87 | 98.11,77.47 98.11,87
S$295
  Bottom 0.711: 100.65,86.36 100.65,92.71
S$296
  Bottom 0.711: E$38.P$4 96.2,83.19
S$297
  Top 0.711: 95.57,92.71 114.62,92.71
S$298
  Bottom 0.711: 103.19,86.36 103.19,96.52
S$299
  Bottom 0.711: 103.19,77.47 103.19,83.82
S$300
  Top 0.711: 95.57,77.47 114.62,77.47
S$301
  Bottom 0.711: 117.16,87 117.16,96.52 | 117.16,87 115.25,87 | 117.16,77.47 117.16,87
S$302
  Bottom 0.711: 119.7,86.36 119.7,92.71
S$303
  Bottom 0.711: E$39.P$4 115.25,83.19
S$304
  Top 0.711: 114.62,92.71 133.67,92.71
S$305
  Bottom 0.711: 122.24,86.36 122.24,96.52
S$306
  Bottom 0.711: 122.24,77.47 122.24,83.82
S$307
  Top 0.711: 114.62,77.47 127.32,77.47
S$308
  Bottom 0.711: 136.21,87 136.21,96.52 | 136.21,87 134.3,87 | 136.21,77.47 136.21,87
S$309
  Bottom 0.711: 138.75,86.36 138.75,92.71
S$310
  Bottom 0.711: E$40.P$4 134.3,83.19
S$311  (via drill 0.6)
  Top 0.711: v143.83,92.71 133.67,92.71
  Bottom 0.406: v143.83,92.71 143.83,79.38 146.37,76.83 E$98.10
S$312
  Bottom 0.711: 141.29,86.36 141.29,96.52
S$313
  Bottom 0.711: 141.29,77.47 141.29,83.82
S$314
  Top 0.406: 145.1,77.47 145.73,77.47 147.64,75.56 150.18,75.56 E$98.9
  Top 0.711: 127.32,77.47 128.59,78.74 132.4,78.74 133.67,77.47 145.1,77.47
S$315
  Bottom 0.711: 40.96,106.05 40.96,115.57 | 40.96,106.05 39.05,106.05 | 40.96,96.52 40.96,106.05
S$316
  Bottom 0.711: 43.5,105.41 43.5,111.76
S$317
  Bottom 0.711: E$42.P$4 39.05,102.23
S$318
  Top 0.711: 38.42,111.76 57.47,111.76
S$319
  Bottom 0.711: 46.04,105.41 46.04,115.57
S$320
  Bottom 0.711: 46.04,96.52 46.04,102.87
S$321
  Top 0.711: 38.42,96.52 57.47,96.52
S$322
  Bottom 0.711: 21.91,106.05 21.91,115.57 | 21.91,106.05 20,106.05 | 21.91,96.52 21.91,106.05
S$323
  Bottom 0.711: 24.45,105.41 24.45,111.76
S$324
  Bottom 0.711: E$43.P$4 20,102.23
S$325
  Top 0.711: 19.37,111.76 32.07,111.76 33.34,110.49 37.15,110.49 38.42,111.76
S$326
  Bottom 0.711: 26.99,105.41 26.99,115.57
S$327
  Bottom 0.711: 26.99,96.52 26.99,102.87
S$328
  Top 0.711: 19.37,96.52 38.42,96.52
S$329
  Top 0.711: 5.4,111.76 19.37,111.76
S$330
  Top 0.711: 6.67,96.52 19.37,96.52
S$331
  Bottom 0.711: 60.01,106.05 60.01,115.57 | 60.01,106.05 58.1,106.05 | 60.01,96.52 60.01,106.05
S$332
  Bottom 0.711: 62.55,105.41 62.55,111.76
S$333
  Bottom 0.711: E$44.P$4 58.1,102.23
S$334
  Top 0.711: 57.47,111.76 76.52,111.76
S$335
  Bottom 0.711: 65.09,105.41 65.09,115.57
S$336
  Bottom 0.711: 65.09,96.52 65.09,102.87
S$337
  Top 0.711: 57.47,96.52 76.52,96.52
S$338
  Bottom 0.711: 79.06,106.05 79.06,115.57 | 79.06,106.05 77.15,106.05 | 79.06,96.52 79.06,106.05
S$339
  Bottom 0.711: 81.6,105.41 81.6,111.76
S$340
  Bottom 0.711: E$45.P$4 77.15,102.23
S$341
  Top 0.711: 76.52,111.76 95.57,111.76
S$342
  Bottom 0.711: 84.14,105.41 84.14,115.57
S$343
  Bottom 0.711: 84.14,96.52 84.14,102.87
S$344
  Top 0.711: 76.52,96.52 95.57,96.52
S$345
  Bottom 0.711: 98.11,106.05 98.11,115.57 | 98.11,106.05 96.2,106.05 | 98.11,96.52 98.11,106.05
S$346
  Bottom 0.711: 100.65,105.41 100.65,111.76
S$347
  Bottom 0.711: E$46.P$4 96.2,102.23
S$348
  Top 0.711: 95.57,111.76 108.27,111.76 109.54,110.49 113.35,110.49 114.62,111.76
S$349
  Bottom 0.711: 103.19,105.41 103.19,115.57
S$350
  Bottom 0.711: 103.19,96.52 103.19,102.87
S$351
  Top 0.711: 95.57,96.52 114.62,96.52
S$352
  Bottom 0.711: 117.16,106.05 117.16,115.57 | 117.16,106.05 115.25,106.05 | 117.16,96.52 117.16,106.05
S$353
  Bottom 0.711: 119.7,105.41 119.7,111.76
S$354
  Bottom 0.711: E$47.P$4 115.25,102.23
S$355
  Top 0.711: 114.62,111.76 133.67,111.76
S$356
  Bottom 0.711: 122.24,105.41 122.24,115.57
S$357
  Bottom 0.711: 122.24,96.52 122.24,102.87
S$358
  Top 0.711: 114.62,96.52 127.32,96.52
S$359
  Bottom 0.711: 136.21,106.05 136.21,115.57 | 136.21,106.05 134.3,106.05 | 136.21,96.52 136.21,106.05
S$360
  Bottom 0.711: 138.75,105.41 138.75,111.76
S$361
  Bottom 0.711: E$48.P$4 134.3,102.23
S$362
  Top 0.406: 146.37,111.76 147.64,110.49 147.64,80.64 E$98.12
  Top 0.711: 146.37,111.76 133.67,111.76
S$363
  Bottom 0.711: 141.29,115.57 141.29,105.41
S$364
  Bottom 0.711: 141.29,96.52 141.29,102.87
S$365  (via drill 0.6)
  Top 0.711: v146.37,96.52 127.32,96.52
  Bottom 0.406: v146.37,96.52 146.37,79.38 147.64,78.11 150.18,78.11 E$98.11
S$366
  Bottom 0.711: 40.96,125.09 40.96,134.62 | 40.96,125.09 39.05,125.09 | 40.96,115.57 40.96,125.09
S$367
  Bottom 0.711: 43.5,124.46 43.5,130.81
S$368
  Bottom 0.711: E$50.P$4 39.05,121.28
S$369
  Top 0.711: 38.42,130.81 57.47,130.81
S$370
  Bottom 0.711: 46.04,124.46 46.04,134.62
S$371
  Bottom 0.711: 46.04,115.57 46.04,121.92
S$372
  Top 0.711: 38.42,115.57 57.47,115.57
S$373
  Bottom 0.711: 21.91,125.09 21.91,134.62 | 21.91,125.09 20,125.09 | 21.91,115.57 21.91,125.09
S$374
  Bottom 0.711: 24.45,124.46 24.45,130.81
S$375
  Bottom 0.711: E$51.P$4 20,121.28
S$376
  Top 0.711: 19.37,130.81 38.42,130.81
S$377
  Bottom 0.711: 26.99,124.46 26.99,134.62
S$378
  Bottom 0.711: 26.99,115.57 26.99,121.92
S$379
  Top 0.711: 19.37,115.57 32.07,115.57 33.34,116.84 37.15,116.84 38.42,115.57
S$380
  Top 0.711: 5.4,130.81 13.02,130.81 14.29,129.54 18.1,129.54 19.37,130.81
S$381
  Top 0.711: 6.67,115.57 19.37,115.57
S$382
  Bottom 0.711: 60.01,125.09 60.01,134.62 | 60.01,125.09 58.1,125.09 | 60.01,115.57 60.01,125.09
S$383
  Bottom 0.711: 62.55,124.46 62.55,130.81
S$384
  Bottom 0.711: E$52.P$4 58.1,121.28
S$385
  Top 0.711: 57.47,130.81 70.17,130.81 71.44,129.54 75.25,129.54 76.52,130.81
S$386
  Bottom 0.711: 65.09,124.46 65.09,134.62
S$387
  Bottom 0.711: 65.09,115.57 65.09,121.92
S$388
  Top 0.711: 57.47,115.57 76.52,115.57
S$389
  Bottom 0.711: 79.06,125.09 79.06,134.62 | 79.06,125.09 77.15,125.09 | 79.06,115.57 79.06,125.09
S$390
  Bottom 0.711: 81.6,124.46 81.6,130.81
S$391
  Bottom 0.711: E$53.P$4 77.15,121.28
S$392
  Top 0.711: 76.52,130.81 95.57,130.81
S$393
  Bottom 0.711: 84.14,124.46 84.14,134.62
S$394
  Bottom 0.711: 84.14,115.57 84.14,121.92
S$395
  Top 0.711: 76.52,115.57 95.57,115.57
S$396
  Bottom 0.711: 98.11,125.09 98.11,134.62 | 98.11,125.09 96.2,125.09 | 98.11,115.57 98.11,125.09
S$397
  Bottom 0.711: 100.65,124.46 100.65,130.81
S$398
  Bottom 0.711: E$54.P$4 96.2,121.28
S$399
  Top 0.711: 95.57,130.81 114.62,130.81
S$400
  Bottom 0.711: 103.19,124.46 103.19,134.62
S$401
  Bottom 0.711: 103.19,115.57 103.19,121.92
S$402
  Top 0.711: 95.57,115.57 108.27,115.57 109.54,116.84 113.35,116.84 114.62,115.57
S$403
  Bottom 0.711: 117.16,125.09 117.16,134.62 | 117.16,125.09 115.25,125.09 | 117.16,115.57 117.16,125.09
S$404
  Bottom 0.711: 119.7,124.46 119.7,130.81
S$405
  Bottom 0.711: E$55.P$4 115.25,121.28
S$406
  Top 0.711: 114.62,130.81 127.32,130.81 128.59,129.54 132.4,129.54 133.67,130.81
S$407
  Bottom 0.711: 122.24,134.62 122.24,124.46
S$408
  Bottom 0.711: 122.24,115.57 122.24,121.92
S$409
  Top 0.711: 114.62,115.57 127.32,115.57
S$410
  Bottom 0.711: 136.21,125.09 136.21,134.62 | 134.3,125.09 136.21,125.09 | 136.21,125.09 136.21,115.57
S$411
  Bottom 0.711: 138.75,124.46 138.75,130.81
S$412
  Bottom 0.711: E$56.P$4 134.3,121.28
S$413  (via drill 0.6)
  Top 0.711: 133.67,130.81 v146.37,130.81
  Bottom 0.406: v146.37,130.81 147.64,129.54 147.64,83.19 E$98.14
S$414
  Bottom 0.711: 141.29,124.46 141.29,134.62
S$415
  Bottom 0.711: 141.29,115.57 141.29,121.92
S$416
  Top 0.406: 146.37,115.57 150.18,111.76 150.18,83.19 E$98.13
  Top 0.711: 146.37,115.57 127.32,115.57
S$419
  Bottom 0.711: 39.05,136.53 39.05,140.34
S$421
  Bottom 0.406: 46.04,143.51 46.04,144.15 52.39,149.86 68.26,149.86 E$97.5
S$422
  Bottom 0.711: 46.04,134.62 46.04,140.97
S$423
  Top 0.711: 38.42,134.62 57.47,134.62
S$424  (via drill 0.3)
  Top 0.406: v21.91,152.4 65.72,152.4 E$97.4
  Bottom 0.711: 21.91,144.15 v21.91,152.4 | 21.91,144.15 20,144.15 | 21.91,134.62 21.91,144.15
S$426
  Bottom 0.711: 20,136.53 20,140.34
S$428
  Bottom 0.406: 26.99,143.51 26.99,150.5 28.89,152.4 65.72,152.4 E$97.3
S$429
  Bottom 0.711: 26.99,134.62 26.99,140.97
S$430
  Top 0.711: 19.37,134.62 38.42,134.62
S$432
  Top 0.711: 6.67,134.62 13.02,134.62 14.29,135.89 18.1,135.89 19.37,134.62
S$433
  Bottom 0.711: 58.1,144.15 60.01,144.15 60.01,134.62
S$435
  Bottom 0.711: 58.1,136.53 58.1,140.34
S$437
  Bottom 0.406: 65.09,143.51 65.09,144.78 66.04,145.73 70.17,145.73 72.07,147.64 E$97.7
S$438
  Bottom 0.711: 65.09,134.62 65.09,140.97
S$439
  Top 0.711: 57.47,134.62 70.17,134.62 71.44,135.89 75.25,135.89 76.52,134.62
S$440
  Bottom 0.711: 77.15,144.15 79.06,144.15 79.06,134.62
S$442
  Bottom 0.711: 77.15,136.53 77.15,140.34
S$445
  Bottom 0.711: 84.14,134.62 84.14,140.97
S$446
  Top 0.711: 76.52,134.62 95.57,134.62
S$447
  Bottom 0.406: 96.2,144.15 92.39,147.96 92.39,149.86
  Bottom 0.711: 96.2,144.15 98.11,144.15 98.11,134.62
S$449
  Bottom 0.711: 96.2,136.53 96.2,140.34
S$451
  Bottom 0.406: 103.19,143.51 103.19,149.86 101.92,151.13 86.68,151.13 84.14,148.59 79.69,148.59 E$97.11
S$452
  Bottom 0.711: 103.19,134.62 103.19,140.97
S$453
  Top 0.711: 95.57,134.62 114.62,134.62
S$455
  Bottom 0.711: 119.7,143.51 119.7,149.86
S$456
  Bottom 0.711: 115.25,140.34 E$63.P$4
S$457
  Top 0.711: 114.62,149.86 133.67,149.86
S$459
  Bottom 0.711: 122.24,134.62 122.24,140.97
S$460
  Top 0.711: 127.32,134.62 114.62,134.62
S$462
  Bottom 0.711: 138.75,143.51 138.75,149.86
S$463
  Bottom 0.711: E$64.P$4 134.3,140.34
S$464  (via drill 0.6)
  Top 0.711: 133.67,149.86 v146.37,149.86
  Bottom 0.406: v146.37,149.86 148.91,147.32 E$98.16
S$471
  Bottom 0.406: 141.29,151.76 139.38,153.67 84.77,153.67 E$97.15
  Bottom 0.711: 141.29,143.51 141.29,151.76
S$472
  Bottom 0.711: 141.29,134.62 141.29,140.97
S$473
  Top 0.406: 146.37,134.62 151.45,129.54 E$98.15
  Top 0.711: 127.32,134.62 128.59,135.89 132.4,135.89 133.67,134.62 146.37,134.62

## Text on the board
bPlace: grid40h06/070605 | monome | http://monome.org
_bsilk: monome_40h_grid